# Altium PCB Antenna.PcbDoc
Units mm, origin at the board's own origin, x right, y up, seen from the top; angles counter-clockwise.
Board outline 46 x 46 mm, 2 copper layers (Top Layer, Bottom Layer); 3 components, 2 nets, 6 pads, 1 vias.
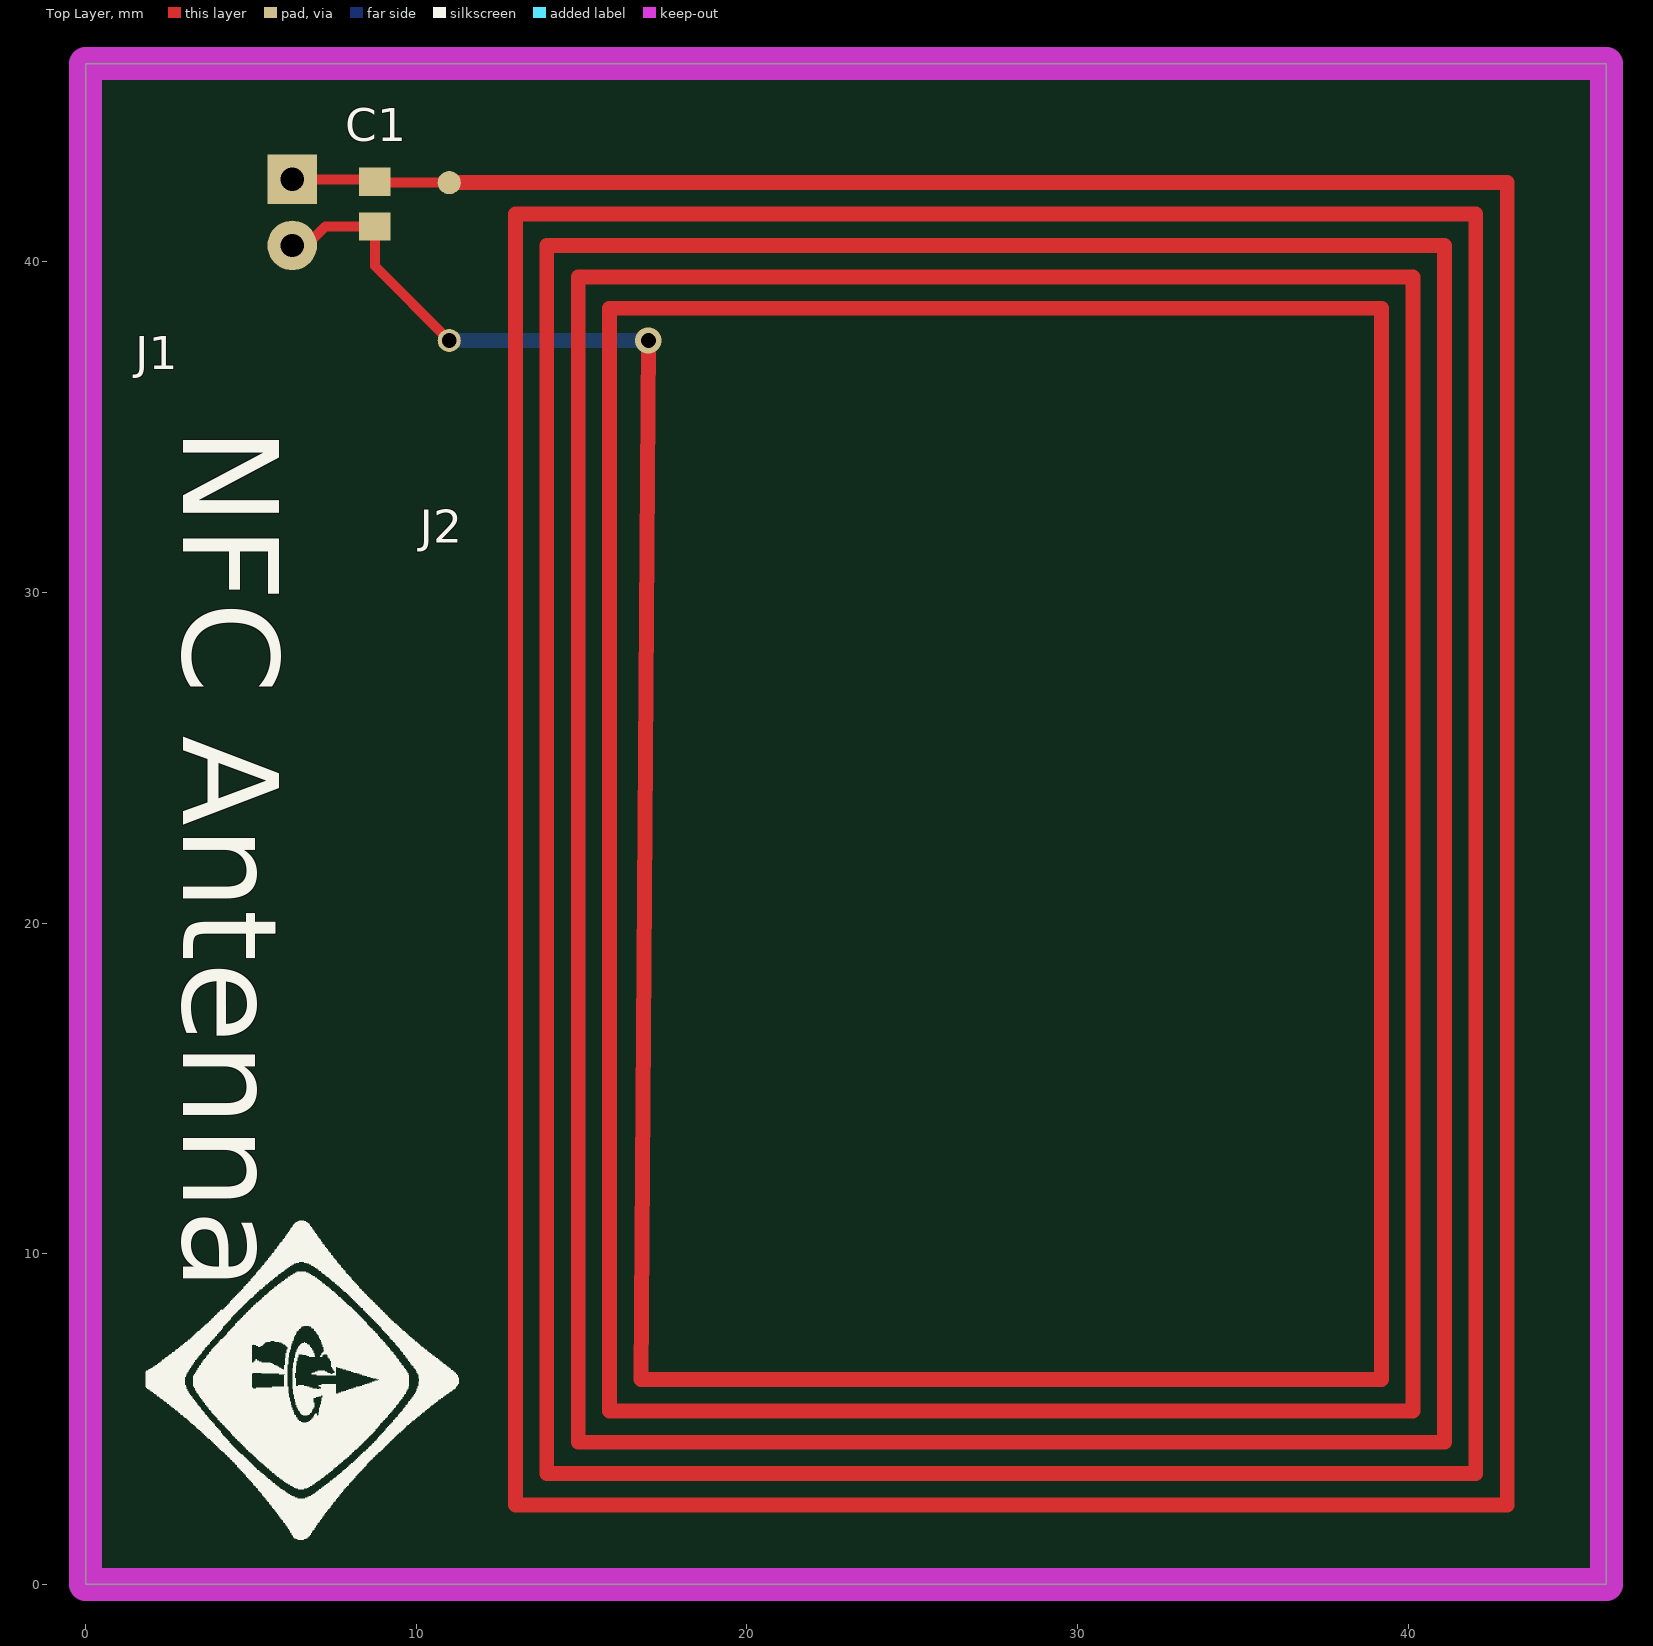
[diagram p0: Top Layer view]
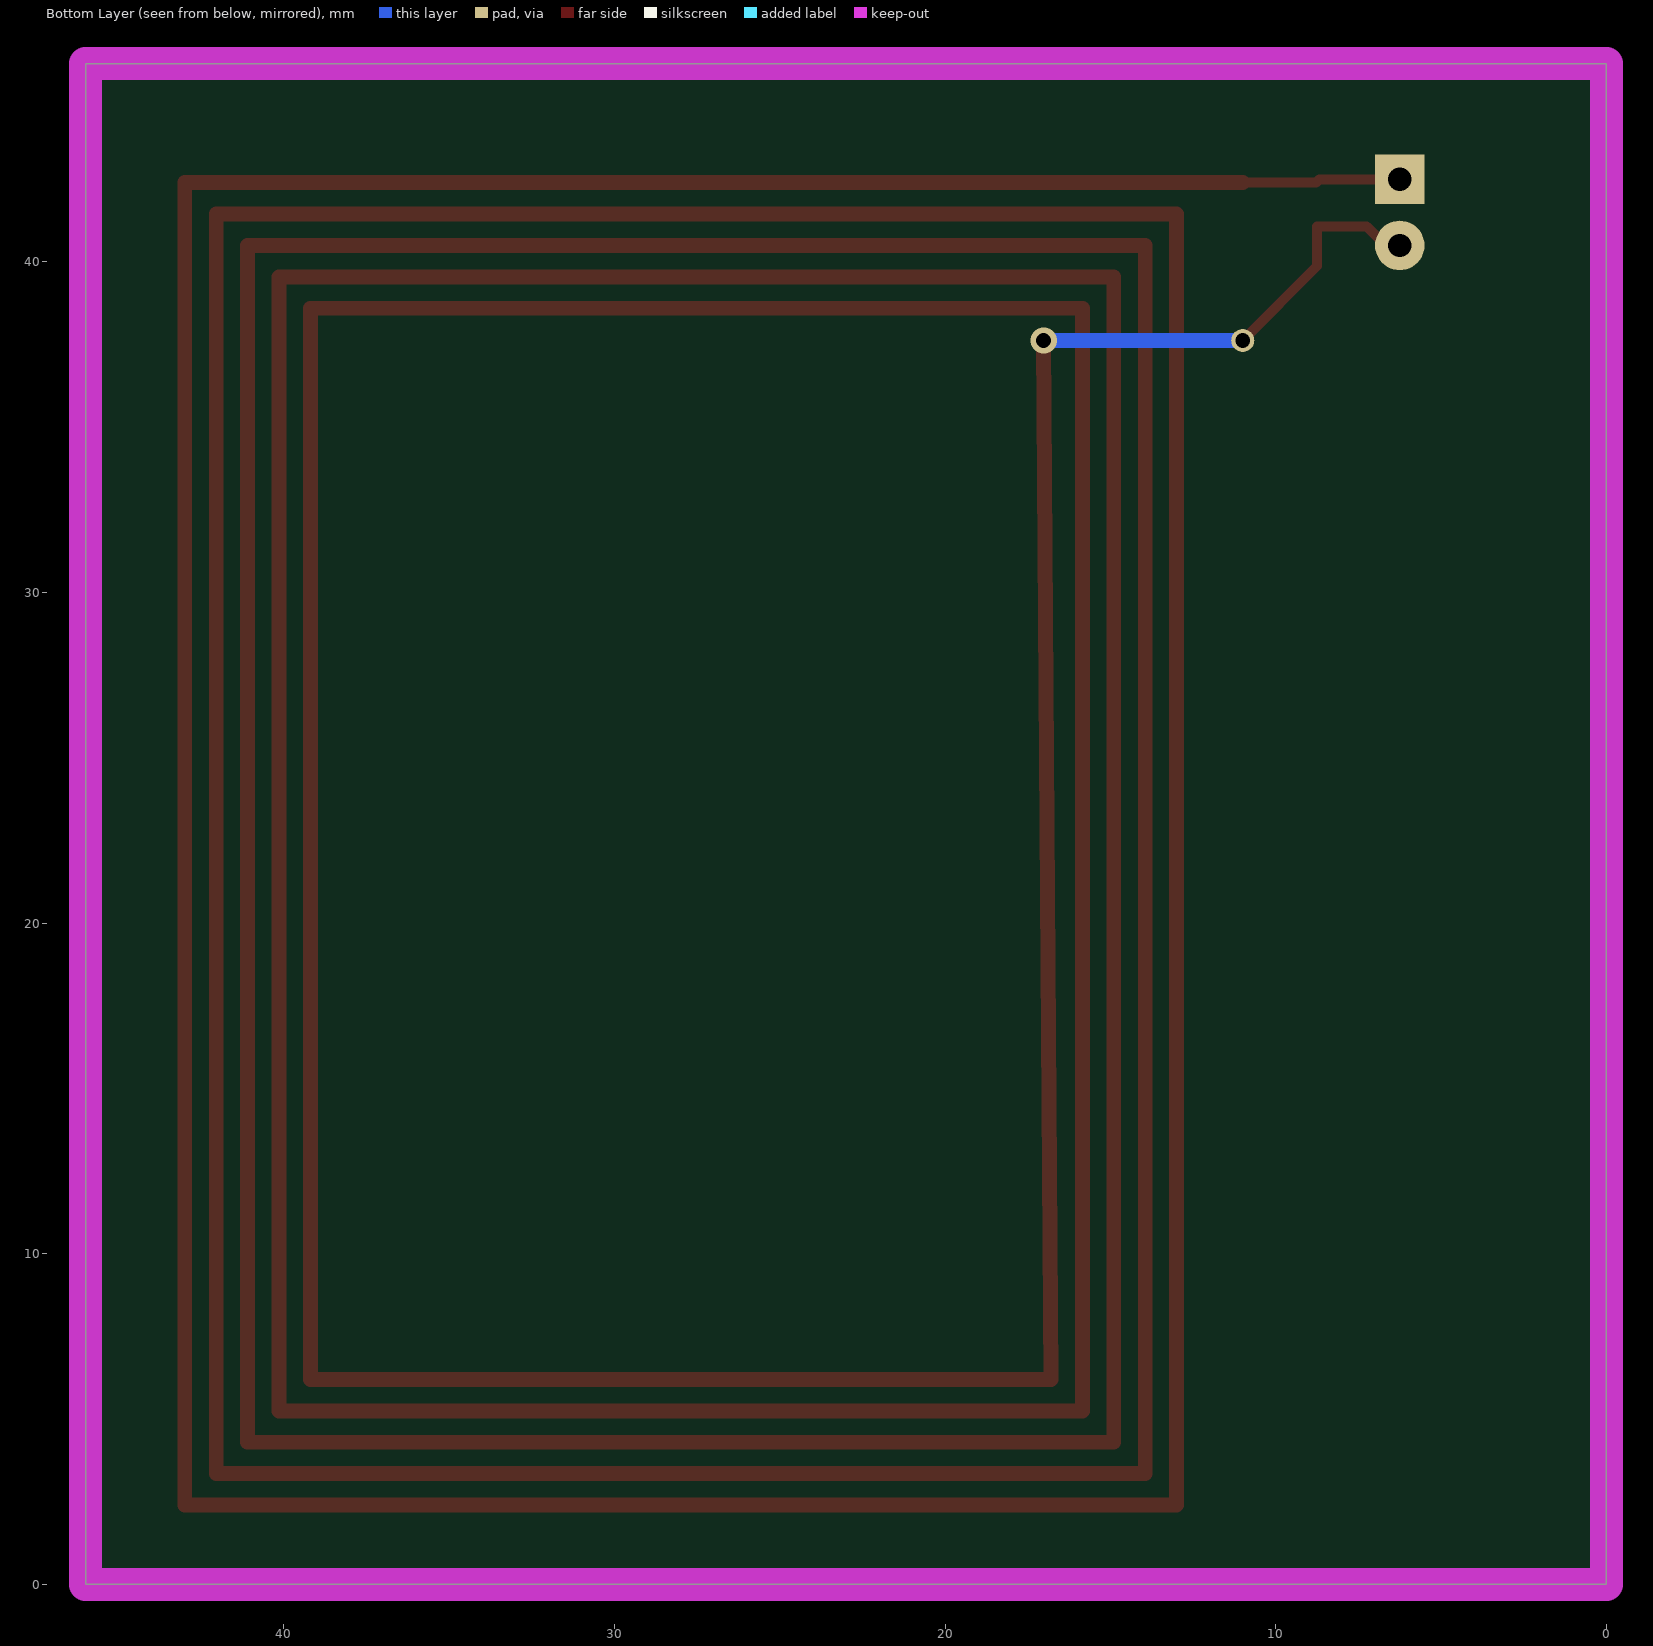
[diagram p1: Bottom Layer view, seen from below]

## Layer stack, top to bottom
Top Solder: solder mask 0.01, Solder Resist, Dk 3.5
Top Layer: signal copper 0.45
Dielectric 1: dielectric 0.32, FR-4, Dk 4.8
Bottom Layer: signal copper 0.0356
Bottom Solder: solder mask 0.0102, Solder Resist, Dk 3.5

## Board outline
0,0 46,0 46,46 0,46

## Design rules (kind name [scope] priority, off if disabled: settings)
Clearance [All] p1: gap=0.254 ignorepadtopadclearanceinfootprint=FALSE except(0: Arc-Hole Track-Hole SMDPad-Hole THPad-Hole Via-Hole Fill-Hole Poly-Hole Region-Hole Text-Hole; 0.089: Arc-Arc Arc-Track Track-Track; 0.127: Arc-Via Track-Via)
PolygonConnect [All] p1: connectstyle=Relief reliefconductorwidth=0.254 reliefentries=4 polygonreliefangle="90 Angle" airgapwidth=0.254
RoutingVias [All] p1: holewidth=0.711 width=1.27 viastyle="Through Hole" minholewidth=0.3 minwidth=0.6 maxholewidth=0.711 maxwidth=1.27
SolderMaskExpansion [All] p1: expansion=0.102
Width [All] p1: maxlimit=1 minlimit=0.089 preferedwidth=0.3
30 further rules are at their usual default settings.

## Classes and differential pairs
component class Antenna: C1 J2

## Components (designator, comment, footprint, x,y, rotation, side; value= is the part's Value field where it differs from the comment)
C1 "CL10C820JB8NNNC" CAPC1608X08N 8.75,41.75 r90 top value=82pF
J1 "S2B-PH-K-S(LF)(SN)" S2B-PH-K-S 6.25,42.5 r0 top
J2 "NFC_ANTENNA" NFC_ANTENNA 13,42.4 r0 top

## Footprints (in the part's own frame and the unit in brackets; to place one, negate y for a bottom-side part, rotate by r counter-clockwise, add the part's x,y. Pads: shape width x height; smd on the part's side, far side on the other; paste and mask are expansions set on the pad)
CAPC1608X08N [mm] "Chip Capacitor, 2-Leads, Body 1,60x0,80mm, IPC Medium Density"
  rect 0.85x0.95 smd: 1(-0.675,0) 2(0.675,0)
  body extent -0.85,-0.45 0.85,0.45, height 0.8
NFC_ANTENNA [mm]
  round 0.7 hole 0.45 unplated: 1(-2,-4.775)
  round 0.7 smd: 2(-2,0)
  Top Layer lines w0.45: -2,0 0,0 30,0 30,-40 0,-40 0,-0.95 29.05,-0.95 29.05,-39.05 0.95,-39.05 0.95,-1.9 28.1,-1.9 28.1,-38.1 1.9,-38.1 1.9,-2.85 27.15,-2.85 27.15,-37.15 2.85,-37.15 2.85,-3.8 26.2,-3.8 26.2,-36.2 3.8,-36.2 4.025,-4.775
  Bottom Layer lines w0.45: -2,-4.775 4.025,-4.775
S2B-PH-K-S [mm]
  round 1.5 hole 0.7: 1(0,-2)
  rect 1.5x1.5 hole 0.7: 2(0,0)
  body extent -6.23,-3.95 1.38,1.95, height 4.8

## Part data
C1: "Cap Ceramic 82pF 50V C0G 5% SMD 0603 125C Paper T/R", Capacitance=82pF, Case/Package=0603, Case Code (Metric)=1608, Dielectric=C0G, Manufacturer=Samsung, Max Operating Temperature=125°C, Min Operating Temperature=-55°C, Package Quantity=1, Supplier Part Number 1=1276-1242-1-ND, Temperature Coefficient=300ppm/°C, Tolerance=5%, Voltage=50V, Case Code (Imperial)=0603, Contact Plating=Tin, Depth=0.8mm, Height=0.8mm, Lead Free="Lead Free", Length=1.6mm, Manufacturer Part Number=CL10C820JB8NNNC, Material=Ceramic, Mount="Surface Mount", Packaging="Tape and Reel", Pricing 1="1=0.1, 10=0.058, 100=0.0257, 500=0.0184, 1000=0.0144 (USD)", Radiation Hardening=No, Stock 1=40000, Supplier 1=Digi-Key, Thickness=0.035inch, Voltage Rating=50V, Voltage Rating (DC)=50V, Width=0.031inch
J1: "2 Positions Header, Shrouded Connector 0.079\" (2.00mm) Through Hole, Right Angle Tin", Colour=Natural,White, Contact Resistance=20mR, Current Rating=2A, Flammability Rating="UL94 V-0", Housing Colour=White, Insulation Resistance=1GR, Manufacturer=JST, Max Operating Temperature=85°C, Max Voltage Rating (AC)=100V, Min Operating Temperature=-25°C, Supplier Part Number 1=455-1719-ND, Connector Type="Male Pin", Contact Material=Brass,Bronze,Tin, Contact Mating Length=0.13inch, Contact Plating=Copper,Tin, Depth=7.6mm, Fastening Type=Detent, Gender=Male, Height=9.4mm, Housing Material=Polyamide, Lead Free="Lead Free", Lead Pitch=2mm, Length=5.9mm, Manufacturer Part Number=S2B-PH-K-S(LF)(SN), Max Current Rating=2A, Max Voltage Rating (DC)=100V, Mount="Through Hole", Number of Contacts=2, Number of Pins=2, Number of Poles=2, Number of Positions=2, Number of Rows=1, Orientation="Right Angle", Packaging=Bulk, Pitch=2mm, Pricing 1="1=0.17, 10=0.161, 100=0.0991, 500=0.082, 1000=0.0718, 5000=0.0615, 10000=0.0598 (USD)", REACH SVHC="No SVHC", Stock 1=238359, Supplier 1=Digi-Key, Termination=Solder, Voltage Rating=100V, Voltage Rating (AC)=100V, Width=4.5mm, Working Voltage=100V

## Via types
v1: diameter 0.8, hole 0.45, Top Layer to Bottom Layer, 1 vias

## Nets (pads, with @x,y where several pads share a name; then routed paths per layer and width w, separated by ;. In a path a pad name is that pad's centre, name@x,y a point inside that pad or via, vN(x,y) a via of type N, cw(c..) or ccw(c..) an arc to the next point about the centre after c; other vN are vias at no path point)
NetC1_1: C1.1 J1.1 J2.1 | length 7.1
  Top Layer w0.3: J1.1 6.675,40.5 7.25,41.075 C1.1 8.75,39.875 J2.1
NetC1_2: C1.2 J1.2 J2.2 | length 4.8
  Top Layer w0.3: J1.2 8.675,42.5 C1.2 8.775,42.4 J2.2
  other v1: 17.025,37.625

## Keep-outs
Keep-Out Layer:
  the board outline again, w1

## Silkscreen, mask and mechanical layers (free items; w line width, h text height)
Top Overlay:
  drawing of 1196 lines, arcs and shapes, not listed
  text "NFC Antenna" at 2,35 h5 r270
Top Solder:
  rectangle: 12,1.4 44,44.4